# Altium PCB ECE453_PWR.PcbDoc
Units mil, origin at the board's own origin, x right, y up, seen from the top; angles counter-clockwise.
Board outline 1771.65 x 2952.76 mil, 2 copper layers (Top Layer, Bottom Layer); 32 components, 13 nets, 93 pads, 20 vias.
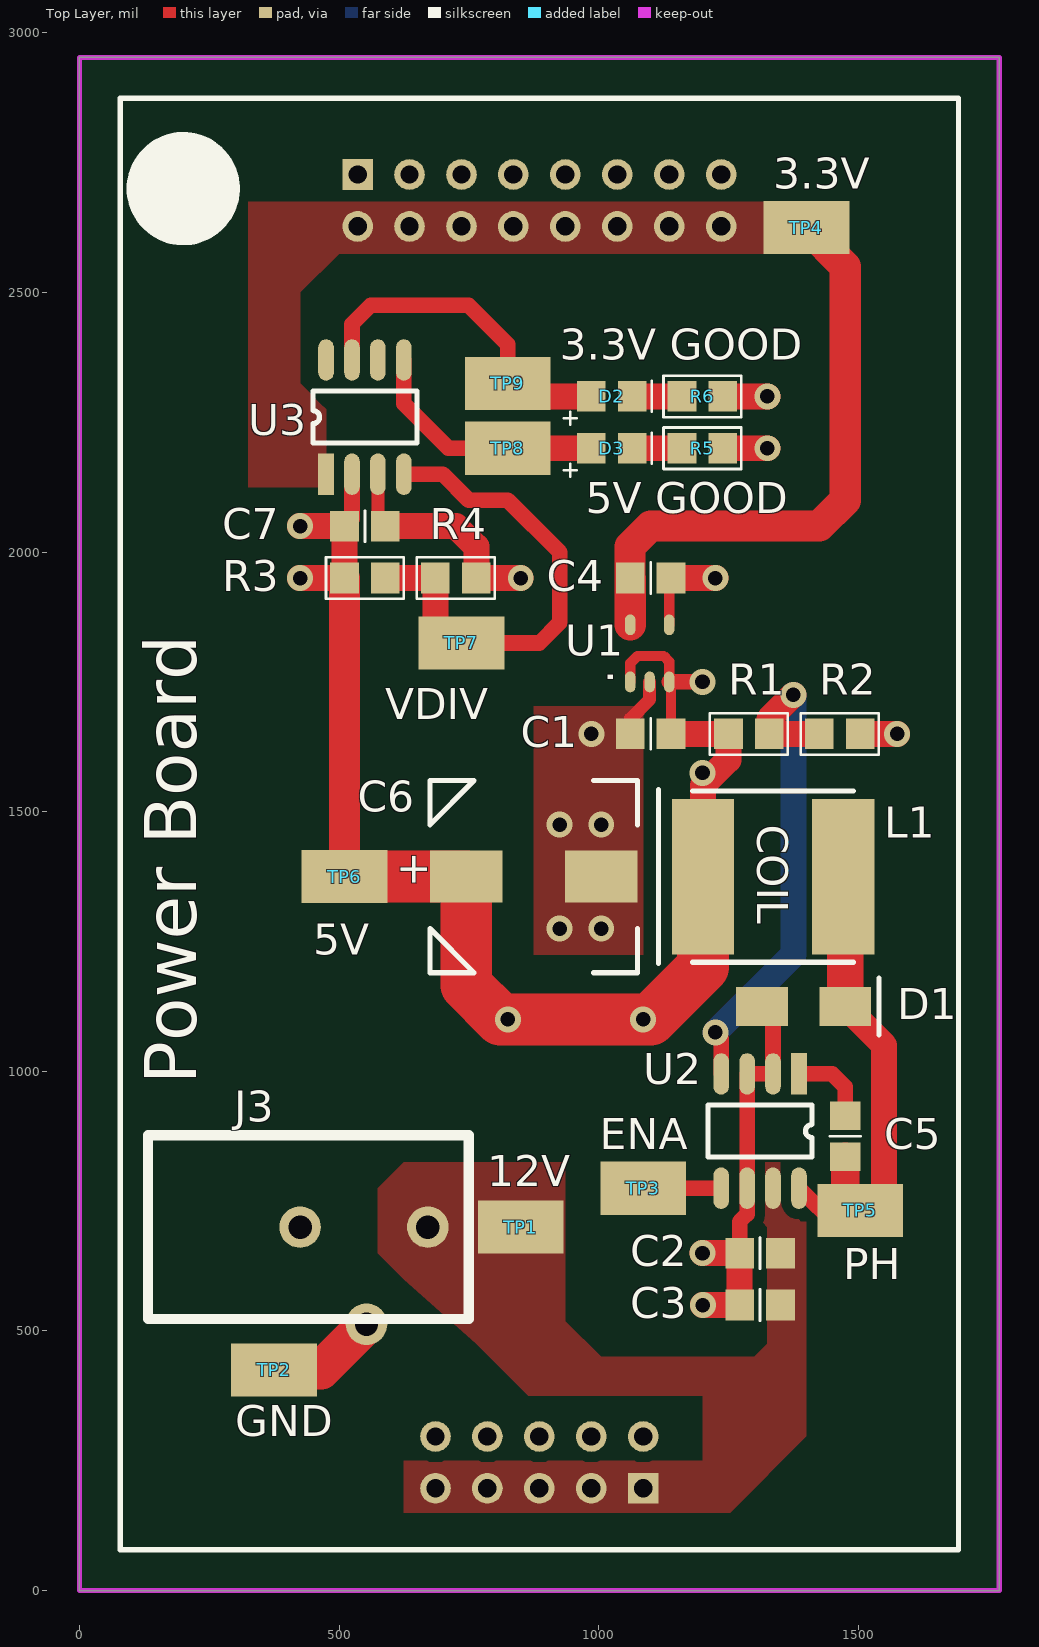
[diagram p0: Top Layer view]
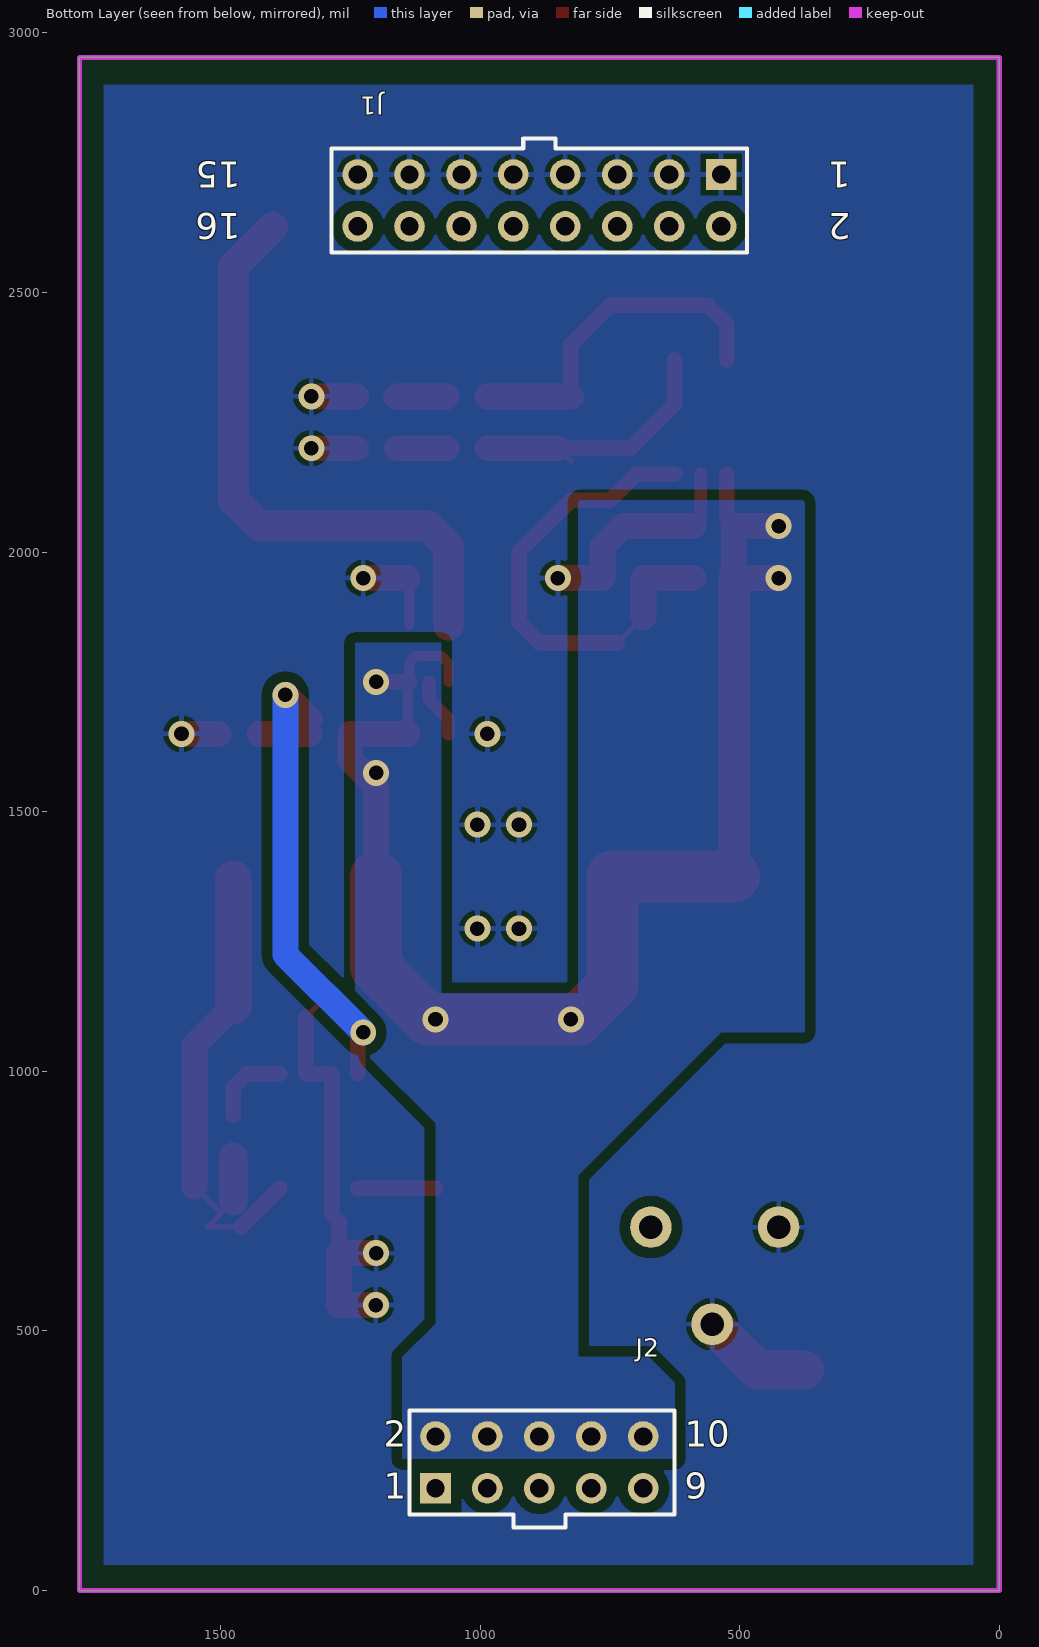
[diagram p1: Bottom Layer view, seen from below]
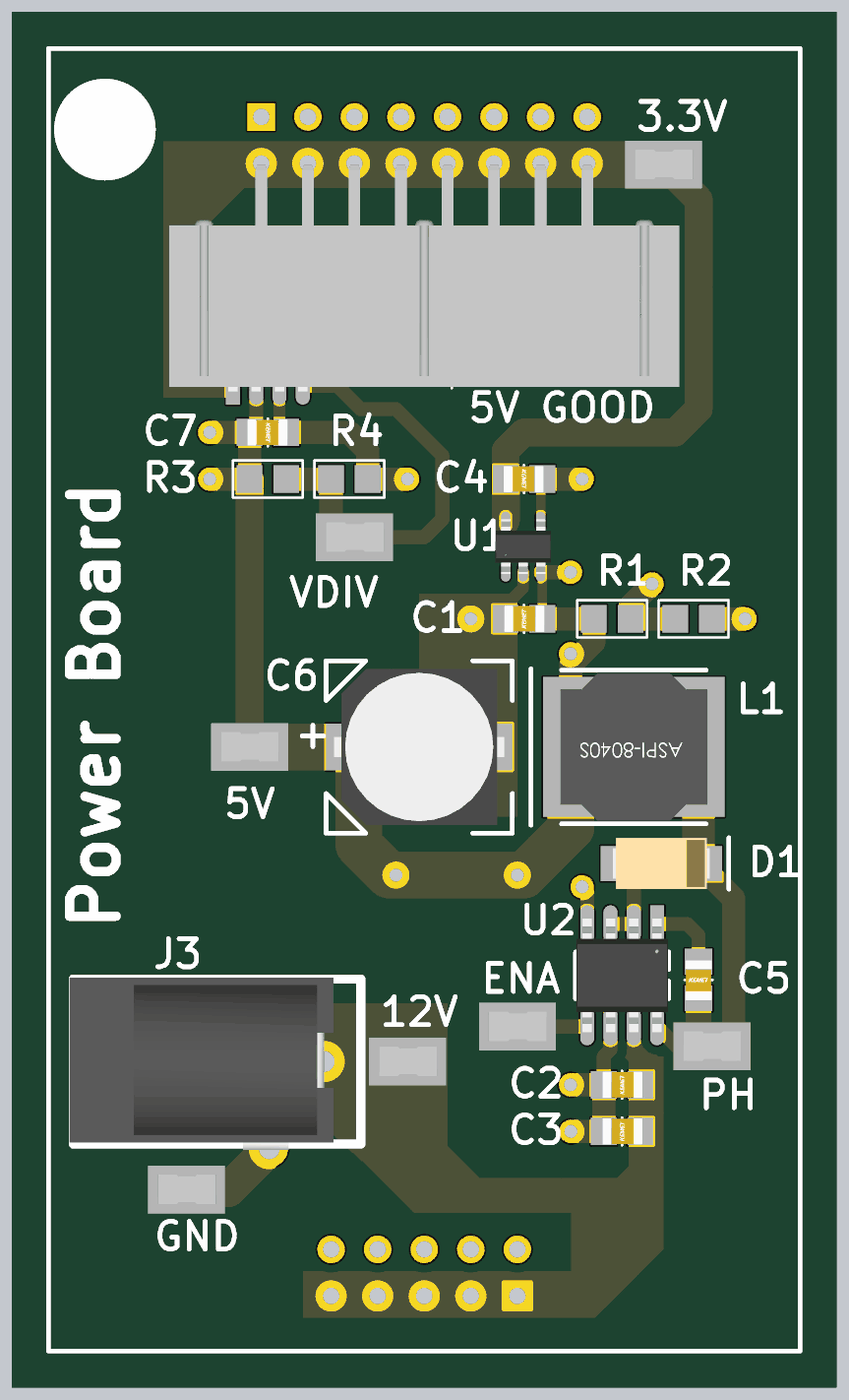
[diagram p2: 3D render of the assembled board from above, using the file's embedded part models]

## Layer stack, top to bottom
Top Solder: solder mask 0.4, Solder Resist, Dk 3.5
Top Layer: signal copper 1.4
Dielectric1: dielectric 12.6, FR-4, Dk 4.8
Bottom Layer: signal copper 1.4
Bottom Solder: solder mask 0.4, Solder Resist, Dk 3.5

## Board outline
0,0 1771.65,0 1771.65,2952.76 0,2952.76

## Design rules (kind name [scope] priority, off if disabled: settings)
Clearance Polygon_Clearance [All vs InPolygon] p1: gap=20 ignorepadtopadclearanceinfootprint=FALSE except(0: Arc-Hole Track-Hole SMDPad-Hole THPad-Hole Via-Hole Fill-Hole Poly-Hole Region-Hole Text-Hole)
Clearance [All] p2: gap=7.87 ignorepadtopadclearanceinfootprint=FALSE except(0: Arc-Hole Track-Hole SMDPad-Hole THPad-Hole Via-Hole Fill-Hole Poly-Hole Region-Hole Text-Hole)
ComponentClearance [InComponent('U3')] p1: gap=0 collisioncheckmode=3 verticalgap=10 showdistances=FALSE
Height [All] p1: minheight=0 maxheight=866.14 prefheight=500
HoleSize [All] p1: absolutevalues=TRUE maxlimit=250 minlimit=15 maxpercent=80.000 minpercent=20.000
MinimumSolderMaskSliver [All] p1: minsoldermaskwidth=7
NetAntennae NetAntennae_5.0V [InNet('5.0V')] p1: netantennaetolerance=0
NetAntennae NetAntennae_3.3V [InNet('3.3V')] p2: netantennaetolerance=0
PolygonConnect no-gaps_2 [All vs IsNamedPolygon('Top Layer-3.3V')] p1: connectstyle=Direct reliefconductorwidth=10 reliefentries=4 polygonreliefangle="90 Angle" airgapwidth=10
PolygonConnect no-gaps_1 [All vs IsNamedPolygon('Bottom Layer-5V')] p2: connectstyle=Direct reliefconductorwidth=10 reliefentries=4 polygonreliefangle="90 Angle" airgapwidth=10
PolygonConnect no-gaps [All vs IsNamedPolygon('Top Layer-GND 1')] p3: connectstyle=Direct reliefconductorwidth=10 reliefentries=4 polygonreliefangle="90 Angle" airgapwidth=10
PolygonConnect direct-connect [All vs IsNamedPolygon('12V_L01_P028')] p4: connectstyle=Direct reliefconductorwidth=15 reliefentries=4 polygonreliefangle="90 Angle" airgapwidth=10
PolygonConnect PolygonConnect_3 [All vs IsNamedPolygon('12V_L01_P028')] p5: thpad.connectstyle=Relief thpad.reliefconductorwidth=15 thpad.reliefentries=4 thpad.polygonreliefangle="90 Angle" thpad.airgapwidth=10 smdpad.connectstyle=Direct smdpad.reliefconductorwidth=10 smdpad.reliefentries=4 smdpad.polygonreliefangle="90 Angle" smdpad.airgapwidth=10 via.connectstyle=Relief via.reliefconductorwidth=10 via.reliefentries=4 via.polygonreliefangle="90 Angle" via.airgapwidth=10
PolygonConnect PolygonConnect_2 [All vs IsNamedPolygon('12V_L01_P028')] p6: thpad.connectstyle=Relief thpad.reliefconductorwidth=10 thpad.reliefentries=4 thpad.polygonreliefangle="90 Angle" thpad.airgapwidth=10 smdpad.connectstyle=Direct smdpad.reliefconductorwidth=10 smdpad.reliefentries=4 smdpad.polygonreliefangle="90 Angle" smdpad.airgapwidth=10 via.connectstyle=Relief via.reliefconductorwidth=10 via.reliefentries=4 via.polygonreliefangle="90 Angle" via.airgapwidth=10
PolygonConnect [IsNamedPolygon('5.0V_L01_P047') vs IsVia] p7: connectstyle=Relief reliefconductorwidth=10 reliefentries=4 polygonreliefangle="90 Angle" airgapwidth=10
PolygonConnect PolygonConnect_1 [All] p8: connectstyle=Relief reliefconductorwidth=10 reliefentries=4 polygonreliefangle="90 Angle" airgapwidth=10
RoutingVias [All] p1: holewidth=28 width=50 viastyle="Through Hole" minholewidth=15 minwidth=25 maxholewidth=28 maxwidth=50
SilkToSilkClearance [All] p1 off: silktosilkclearance=10
SilkToSolderMaskClearance [IsPad] p1 off: minsilkscreentomaskgap=6 clearancetoexposedcopper=TRUE
SolderMaskExpansion [All] p1: expansion=4
Width [All] p1: maxlimit=472.44 minlimit=3.94 preferedwidth=10 minimp=50.000000 maximp=50.000000 favimp=50.000000
23 further rules are at their usual default settings.

## Components (designator, comment, footprint, x,y, rotation, side; value= is the part's Value field where it differs from the comment)
C1 "1uF" CAP_0805 1100,1650 r0 top value=10UF
C2 "4.7uF" CAP_0805 1310.83,650 r0 top value=4.7UF
C3 "4.7uF" CAP_0805 1310.83,550 r0 top value=4.7UF
C4 "1uF" CAP_0805 1100,1950 r180 top value=10UF
C5 "0.01uF" CAP_0805 1475,875 r270 top value=10000PF
C6 "100 uF" CAP_100UF 875,1375 r90 top
C7 "0.1uF" CAP_0805 550,2050 r180 top value=1UF
D1 "DIODE_B340A" B340A 1320,1125 r0 top
D2 "LED_GREEN_0805.1" DIODE_0805 1025,2300 r180 top value="GRN (571nm)"
D3 "LED_GREEN_0805.1" DIODE_0805 1025,2200 r180 top value="GRN (571nm)"
J1 "CONN_HEADER_MALE_8x2" SBH11-PBPC-D08-ST-BK 885.83,2677.17 r0 bottom
J2 "CONN_HEADER_MALE_5x2" SBH11-PBPC-D05-ST-BK 885.83,246.85 r180 bottom
J3 "PWR2.5" PJ-102 671.05,700 r90 top
L1 "IND_8040S_270M" IND-ASPI-8040S 1335.83,1375 r270 top
R1 "10k" RES_0805 1289.37,1650 r180 top
R2 "RES_0805_K_003.34" RES_0805 1464.37,1650 r180 top
R3 "27K" RES_0805 550,1950 r180 top
R4 "10K" RES_0805 725,1950 r180 top
R5 "330" RES_0805 1200,2200 r0 top
R6 "330" RES_0805 1200,2300 r0 top
TP1 "TP_1206" TP-SMC-1206 850,700 r0 top
TP2 "TP_1206" TP-SMC-1206 375,425 r0 top
TP3 "TP_1206" TP-SMC-1206 1085.83,775 r0 top
TP4 "TP_1206" TP-SMC-1206 1400,2625 r0 top
TP5 "TP_1206" TP-SMC-1206 1503.74,732.35 r0 top
TP6 "TP_1206" TP-SMC-1206 510.63,1375 r0 top
TP7 "TP_1206" TP-SMC-1206 735.83,1825 r0 top
TP8 "TP_1206" TP-SMC-1206 825,2200 r0 top
TP9 "TP_1206" TP-SMC-1206 825,2325 r0 top
U1 "IC-TLV733P" TI-SOT-23-5 1058.33,1755 r90 top
U2 "IC_TPS5420" TI-SOIC-8 1385.83,995 r270 top
U3 "IC_TPS3705-33DGN.1" TI-SOIC-8 475,2150 r90 top

## Footprints (in the part's own frame and the unit in brackets; to place one, negate y for a bottom-side part, rotate by r counter-clockwise, add the part's x,y. Pads: shape width x height; smd on the part's side, far side on the other; paste and mask are expansions set on the pad)
B340A [mil]
  rect 100x75 smd: 1(-5,0) 2(155,0)
  silkscreen extent 220,-55 220,55, body extent -29,-55 179,55, height 92
CAP_100UF [mil]
  rect 100x140 smd: 1(0,130) 2(0,-130)
  silkscreen extent -185,-240 185,200, body extent -167,-183 167,183, height 407
CAP_0805 [mm]
  rect 1.4x1.5 smd: 1(-1,0) 2(1,0)
  silkscreen extent 0,-0.76 0,0.76, body extent -1.08,-0.72 1.12,0.73, height 0.88
DIODE_0805 [mm]
  rect 1.4x1.5 smd: 1(-1,0) 2(1,0)
  silkscreen extent -1.97,-0.76 2.35,1.4, body extent -1.03,-0.63 1.03,0.64, height 0.71
IND-ASPI-8040S [mil]
  rect 300x120 smd: 1(0,135) 2(0,-135)
  silkscreen extent -165,-155 165,155, body extent -157,-157 157,157
PJ-102 [mil]
  round 80 hole 45: 1(0,0) 2(0,246.05) 3(-187,118.1)
  silkscreen extent -177,-79 177,539, body extent -190,-20 180,547, height 435
RES_0805 [mm]
  rect 1.4x1.5 smd: 1(-1,0) 2(1,0)
  silkscreen extent -1.91,-1.02 1.91,1.02, body extent -1.07,-0.7 1.07,0.7, height 0.7
SBH11-PBPC-D05-ST-BK [mm]
  rect 1.5x1.5 hole 0.9: 1(-5.08,-1.27)
  round 1.5 hole 0.9: 2(-5.08,1.27) 3(-2.54,-1.27) 4(-2.54,1.27) 5(0,-1.27) 6(0,1.27) 7(2.54,-1.27) 8(2.54,1.27) 9(5.08,-1.27) 10(5.08,1.27)
  silkscreen extent -6.35,-3.17 6.6,2.54, body extent -10.1,-4.45 10.1,4.65, height 8.95
SBH11-PBPC-D08-ST-BK [mm]
  rect 1.5x1.5 hole 0.9: 1(-8.89,-1.27)
  round 1.5 hole 0.9: 2(-8.89,1.27) 3(-6.35,-1.27) 4(-6.35,1.27) 5(-3.81,-1.27) 6(-3.81,1.27) 7(-1.27,-1.27) 8(-1.27,1.27) 9(1.27,-1.27) 10(1.27,1.27) 11(3.81,-1.27) 12(3.81,1.27) 13(6.35,-1.27) 14(6.35,1.27) 15(8.89,-1.27) 16(8.89,1.27)
  silkscreen extent -10.16,-3.03 10.17,2.54, body extent -13.9,-4.34 13.92,4.76, height 9.26
TI-SOIC-8 [mil]
  rect 80x30 smd: 1(0,0)
  oval 80x30 smd: 2(0,-50) 3(0,-100) 4(0,-150) 5(220,-150) 6(220,-100) 7(220,-50) 8(220,0)
  silkscreen extent 60,-175 160,25, body extent -12,-173 232,24, height 69
TI-SOT-23-5 [mil]
  oval 40x20 smd: 1(-5,-2.5) 2(-5,-40) 3(-5,-77.5) 4(105,-77.5) 5(105,-2.5)
  body extent -9,-100 109,20, height 57
TP-SMC-1206 [mm]
  rect 4.2x2.6 smd mask+0: 1(0,0)
  body extent -1.57,-0.79 1.63,0.81, height 1.22

## Part data
C1 C4: library part CAP_0805_U_001.00, "CAP CER 1 UF 6.3V 10% X5R 0805", Package=0805, Rating=6.3V, Supplier Part Number 1=399-9160-1-ND, Tolerance=+/-10%, Supplier 1=Digi-Key
C2 C3: library part CAP_0805_U_004.70, "CAP CER 4.7 UF 16V 10% X5R 0805", Package=0805, Rating=16V, Supplier Part Number 1=478-5166-6-ND, Tolerance=+/-10%, Supplier 1=Digi-Key
C5: library part CAP_0805_U_000.01, "CAP CER 10000PF 16V 10% X7R 0805", Package=0805, Rating=16V, Supplier Part Number 1=399-7995-1-ND, Tolerance=+/-10%, Supplier 1=Digi-Key
C6: library part CAP_100uF, Capacitance=100µF, ESR (Equivalent Series Resistance)=-, Lifetime @ Temp.="5000 Hrs @ 105°C", Manufacturer=Nichicon, Manufacturer Part Number=UCD1V101MNL1GS, Operating Temperature="-55°C ~ 105°C", Package / Case="Radial, Can - SMD", Ripple Current=600mA, Supplier Part Number 1=493-6186-1-ND, Tolerance=±20%, Voltage Rating=35V, Applications="General Purpose", Category=Capacitors, ComponentLink1Description=http://nichicon-us.com/english/products/pdfs/e-cd.pdf, ComponentLink1URL=http://nichicon-us.com/english/products/pdfs/e-cd.pdf, Height - Seated (Max)="0.413\" (10.50mm)", Impedance="160 mOhm", Lead Spacing=-, Mounting Type="Surface Mount", Packaging="Cut Tape (CT)", Pricing 1="1=0.57, 10=0.548, 25=0.3884, 50=0.3272, 100=0.2659, 250=0.22088 (USD)", RoHS="RoHS Compliant", Size / Dimension="0.315\" Dia (8.00mm)", Stock 1=2915, Supplier 1=Digi-Key, Surface Mount Land Size="0.327\" L x 0.327\" W (8.30mm x 8.30mm)", Type=-
C7: library part CAP_0805_U_000.10, "CAP CER 0.1 UF 6.3V 10% X7R 0805", Package=0805, Rating=6.3V, Supplier Part Number 1=399-9155-6-ND, Tolerance=+/-10%, Supplier 1=Digi-Key
D1: "DIODE SCHOTTKY 40V 3A SMA", Average Rectified Current=3A, Capacitance=250pF, Case/Package=SMA, Forward Voltage=500mV, Manufacturer=Diodes, Manufacturer Part Number=B340A-13-F, Max Forward Surge Current (Ifsm)=80A, Max Operating Temperature=125°C, Max Repetitive Reverse Voltage (Vrrm)=40V, Min Operating Temperature=-55°C, Package Quantity=5000, Peak Reverse Current=500uA, Supplier Part Number 1=B340A-FDICT-ND, ComponentLink1Description=http://www.mccsemi.com/up_pdf/MBRX120-MBRX160(SOD123).pdf, ComponentLink1URL=http://www.mccsemi.com/up_pdf/MBRX120-MBRX160(SOD123).pdf, ComponentLink2Description=https://datasheet.ciiva.com/4245/861ds30891-4245763.pdf, ComponentLink2URL=https://datasheet.ciiva.com/4245/861ds30891-4245763.pdf, ComponentLink3Description=https://datasheet.ciiva.com/1177/ds30891-1177476.pdf, ComponentLink3URL=https://datasheet.ciiva.com/1177/ds30891-1177476.pdf, ComponentLink4Description=https://datasheet.ciiva.com/1240/ds30891-1240228.pdf, ComponentLink4URL=https://datasheet.ciiva.com/1240/ds30891-1240228.pdf, ComponentLink5Description=https://datasheet.ciiva.com/913/ds30891-913637.pdf, ComponentLink5URL=https://datasheet.ciiva.com/913/ds30891-913637.pdf, ComponentLink6Description=https://datasheet.ciiva.com/913/ds30891-913638.pdf, ComponentLink6URL=https://datasheet.ciiva.com/913/ds30891-913638.pdf, ComponentLink7Description=https://datasheet.ciiva.com/913/ds30891-913639.pdf, ComponentLink7URL=https://datasheet.ciiva.com/913/ds30891-913639.pdf, ComponentLink8Description=https://datasheet.ciiva.com/26949/getdatasheetpartid-143394-26949352.pdf, ComponentLink8URL=https://datasheet.ciiva.com/26949/getdatasheetpartid-143394-26949352.pdf, ComponentLink9Description=https://datasheet.ciiva.com/46393/1911813-46393773.pdf, ComponentLink9URL=https://datasheet.ciiva.com/46393/1911813-46393773.pdf, Contact Plating=Tin,Matte, Current=3A, Current Rating=3A, Element Configuration=Single, Forward Current=3A, Height=2.3mm, Lead Free="Lead Free", Length=4.6mm, Max Reverse Voltage (DC)=40V, Mount="Surface Mount", Number of Pins=2, Output Current=3A, Packaging="Tape and Reel", Peak Non-Repetitive Surge Current=80A, Polarity=Standard, Pricing 1="1=0.46, 10=0.373, 100=0.2538, 500=0.19034, 1000=0.14276 (USD)", Radiation Hardening=No, REACH SVHC="No SVHC", Stock 1=590182, Supplier 1=Digi-Key, Termination=SMD/SMT, Voltage=40V, Voltage Rating (DC)=40V, Weight=0.002258oz, Width=2.92mm
D2 D3: "LED GREEN CLEAR THIN 0805 SMD", Package=0805, Rating=20mA, Supplier Part Number 1=160-1426-1-ND, Tolerance=N/A, Supplier 1=Digi-Key
J1: "CONN HEADER 2.54MM 16POS GOLD", Color=Black, Manufacturer="Sullins Connector Solutions", Manufacturer Part Number=SBH11-PBPC-D08-ST-BK, Supplier Part Number 1=S9171-ND, Category="Connectors, Interconnects", ComponentLink1Description=http://sullinscorp.com/catalogs/145_PAGE118_.100_SBH11_SERIES_MALE_BOX_HDR_ST_RA_SMT.pdf, ComponentLink1URL=http://sullinscorp.com/catalogs/145_PAGE118_.100_SBH11_SERIES_MALE_BOX_HDR_ST_RA_SMT.pdf, Connector Type="Header, Shrouded", Contact Finish=Gold, Contact Finish Thickness=Flash, Contact Mating Length=-, Contact Type="Male Pin", Fastening Type=-, Features="Polarizing Key", Mounting Type="Through Hole", Number of Positions=16, Number of Positions Loaded=All, Number of Rows=2, Packaging=Tray, Part Status=Active, Pitch="0.100\" (2.54mm)", Pricing 1="1=0.55, 10=0.428, 25=0.3988, 50=0.3626, 100=0.3263, 250=0.27552, 500=0.261, 1000=0.232, 2500=0.19285 (USD)", RoHS="RoHS Compliant", Row Spacing="0.100\" (2.54mm)", Stock 1=13784, Supplier 1=Digi-Key, Termination=Solder
J2: "CONN HEADER 2.54MM 10POS GOLD", Color=Black, Manufacturer="Sullins Connector Solutions", Manufacturer Part Number=SBH11-PBPC-D05-ST-BK, Supplier Part Number 1=S9169-ND, Category="Connectors, Interconnects", ComponentLink1Description=http://sullinscorp.com/catalogs/145_PAGE118_.100_SBH11_SERIES_MALE_BOX_HDR_ST_RA_SMT.pdf, ComponentLink1URL=http://sullinscorp.com/catalogs/145_PAGE118_.100_SBH11_SERIES_MALE_BOX_HDR_ST_RA_SMT.pdf, Connector Type="Header, Shrouded", Contact Finish=Gold, Contact Finish Thickness=Flash, Contact Mating Length=-, Contact Type="Male Pin", Fastening Type=-, Features="Polarizing Key", Mounting Type="Through Hole", Number of Positions=10, Number of Positions Loaded=All, Number of Rows=2, Packaging=Tray, Part Status=Active, Pitch="0.100\" (2.54mm)", Pricing 1="1=0.64, 10=0.445, 25=0.3812, 50=0.343, 100=0.2985, 250=0.254, 500=0.2413, 1000=0.2159, 2500=0.17145 (USD)", RoHS="RoHS Compliant", Row Spacing="0.100\" (2.54mm)", Stock 1=29227, Supplier 1=Digi-Key, Termination=Solder
J3: "Low Voltage Power Supply Connector", Colour=Black, Current Rating=2.5A, Flammability Rating="UL94 V-0", Insulation Resistance=50MR, Manufacturer=CUI, Manufacturer Part Number=PJ-102A, Max Operating Temperature=85°C, Min Operating Temperature=-25°C, Package Quantity=280, Supplier Part Number 1=CP-102A-ND, Voltage Rating=24V, ComponentLink1Description="Manufacturer Link", ComponentLink1URL=http://domino.kycon.com/internet/Products.html, ComponentLink2Description=http://www.cui.com/Product/Resource/FuturePDF/PJ-102A.pdf, ComponentLink2URL=http://www.cui.com/Product/Resource/FuturePDF/PJ-102A.pdf, ComponentLink3Description=http://www.mouser.com/ds/2/670/PJ-102A-524195.pdf, ComponentLink3URL=http://www.mouser.com/ds/2/670/PJ-102A-524195.pdf, ComponentLink4Description=https://www.cui.com/product/resource/digikeypdf/pj-102a.pdf, ComponentLink4URL=https://www.cui.com/product/resource/digikeypdf/pj-102a.pdf, Connector Type=Jack, Contact Gender=Male, Contact Material=Copper, Contact Plating=Nickel, DatasheetDocument=09-May-2002, Diameter=2.1mm, Gender=Male, Housing Colour=Black, Housing Material=Thermoplastic, Lead Free="Lead Free", Mount="Through Hole", Number of Conductors=2, Orientation=Horizontal, Packaging=Bulk, Pricing 1="1=0.64, 10=0.6, 25=0.54, 50=0.48, 100=0.46, 250=0.42, 500=0.4, 1000=0.33, 2500=0.3 (USD)", Published=17-Dec-2003, Publisher="Altium Limited", Shielding=Unshielded, Stock 1=20997, Supplier 1=Digi-Key, Termination="Through Hole"
L1: Case/Package=Nonstandard, Current Rating=2A, DC Resistance (DCR)=78mR, Inductance=27uh, Manufacturer=Abracon, Manufacturer Part Number=ASPI-8040S-270M-T, Max Operating Temperature=125°C, Min Operating Temperature=-40°C, Package Quantity=1000, Saturation Current=2.15A, Self Resonant Frequency=9.2MHz, Supplier Part Number 1=ASPI-8040S-270M-TCT-ND, Test Frequency=100kHz, Tolerance=20%, ComponentLink1Description=http://www.abracon.com/Magnetics/chips/AIML-1206.pdf, ComponentLink1URL=http://www.abracon.com/Magnetics/chips/AIML-1206.pdf, ComponentLink2Description=https://datasheet.ciiva.com/8518/aspi-8040s-8518746.pdf, ComponentLink2URL=https://datasheet.ciiva.com/8518/aspi-8040s-8518746.pdf, ComponentLink3Description=https://datasheet.ciiva.com/1080/aspi-8040s-1080475.pdf, ComponentLink3URL=https://datasheet.ciiva.com/1080/aspi-8040s-1080475.pdf, ComponentLink4Description=https://datasheet.ciiva.com/1080/aspi-8040s-1080476.pdf, ComponentLink4URL=https://datasheet.ciiva.com/1080/aspi-8040s-1080476.pdf, Composition=Wirewound, Core Material=Ferrite, Height=4mm, Height - Seated (Max)=0.157inch, Lead Free="Lead Free", Length=0.315inch, Max DC Current=2A, Mount="Surface Mount", Packaging="Tape and Reel", Pricing 1="1=0.97, 10=0.897, 100=0.6486, 500=0.4968 (USD)", Shielding=Shielded, Stock 1=2115, Supplier 1=Digi-Key, Width=0.315inch
R1: library part RES_0805_K_010.00, "RES SMD 10K OHM 1% 1/8W 0805", Manufacturer="Panasonic Electronic Components", Manufacturer Part Number=ERJ-6ENF1002V, Operating Temperature="-55°C ~ 155°C", Package / Case="0805 (2012 Metric)", Power (Watts)="0.125W, 1/8W", Supplier Device Package=0805, Supplier Part Number=P10.0KCCT-ND, Temperature Coefficient=±100ppm/°C, Tolerance=±1%, Category=Resistors, Composition="Thick Film", Failure Rate=-, Features="Automotive AEC-Q200", Height - Seated (Max)="0.028\" (0.70mm)", Number of Terminations=2, Packaging="Cut Tape (CT)", Part Status=Active, Resistance (Ohms)=10k, RoHS="RoHS Compliant", Size / Dimension="0.079\" L x 0.049\" W (2.00mm x 1.25mm)", Supplier=Digi-Key
R2: "RES SMD 3.24K OHM 1% 1/8W 0805", Case/Package=0805, Case Code (Metric)=2012, Manufacturer=Panasonic, Manufacturer Part Number=ERJ-6ENF3241V, Max Operating Temperature=155°C, Max Power Dissipation=125mW, Min Operating Temperature=-55°C, Package Quantity=1, Resistance=3.24k, Supplier Part Number 1=P3.24KCCT-ND, Temperature Coefficient=100ppm/°C, Tolerance=1%, Voltage Rating=150V, Case Code (Imperial)=0805, ComponentLink1Description=https://datasheet.ciiva.com/9196/aoa0000ce2-9196535.pdf, ComponentLink1URL=https://datasheet.ciiva.com/9196/aoa0000ce2-9196535.pdf, ComponentLink2Description=https://datasheet.ciiva.com/30112/aoa0000ce2-30112759.pdf, ComponentLink2URL=https://datasheet.ciiva.com/30112/aoa0000ce2-30112759.pdf, ComponentLink3Description=https://datasheet.ciiva.com/28531/1694929-28531704.pdf, ComponentLink3URL=https://datasheet.ciiva.com/28531/1694929-28531704.pdf, ComponentLink4Description=https://datasheet.ciiva.com/46372/1678782-46372873.pdf, ComponentLink4URL=https://datasheet.ciiva.com/46372/1678782-46372873.pdf, ComponentLink5Description=https://datasheet.ciiva.com/17213/aoa0000ce2-17213770.pdf, ComponentLink5URL=https://datasheet.ciiva.com/17213/aoa0000ce2-17213770.pdf, ComponentLink6Description=https://datasheet.ciiva.com/46372/1678782-46372874.pdf, ComponentLink6URL=https://datasheet.ciiva.com/46372/1678782-46372874.pdf, ComponentLink7Description=https://datasheet.ciiva.com/24026/aoa0000ce2-24026155.pdf, ComponentLink7URL=https://datasheet.ciiva.com/24026/aoa0000ce2-24026155.pdf, ComponentLink8Description=https://datasheet.ciiva.com/22668/1678782-22668189.pdf, ComponentLink8URL=https://datasheet.ciiva.com/22668/1678782-22668189.pdf, Composition="Thick Film", Contact Plating=Tin, Depth=1.25mm, Height=0.6mm, Lead Free="Lead Free", Length=2mm, Military Standard=Not, Mount="Surface Mount", Number of Terminations=2, Packaging="Tape and Reel", Power Rating=125mW, Pricing 1="1=0.1, 10=0.079, 100=0.0305, 1000=0.0134, 2500=0.01157 (USD)", Radiation Hardening=No, REACH SVHC="No SVHC", Stock 1=232903, Supplier 1=Digi-Key, Termination=SMD/SMT, Voltage Rating (DC)=150V, Width=0.049inch
R3: library part RES_0805_K_027.00, "RES SMD 27.0K OHM 1% 1/8W 0805", Manufacturer="Panasonic Electronic Components", Manufacturer Part Number=ERJ-6ENF2802V, Operating Temperature="-55°C ~ 155°C", Package / Case="0805 (2012 Metric)", Power (Watts)="0.125W, 1/8W", Resistance (Ohms)=28k, Supplier Device Package=0805, Supplier Part Number=P28.0KCCT-ND, Supplier Part Number 1=CR0805-FX-2702GLFDKR-ND, Temperature Coefficient=±100ppm/°C, Tolerance=±1%, Category=Resistors, Composition="Thick Film", Failure Rate=-, Features="Automotive AEC-Q200", Height - Seated (Max)="0.028\" (0.70mm)", Number of Terminations=2, Packaging="Cut Tape (CT)", Part Status=Active, RoHS="RoHS Compliant", Size / Dimension="0.079\" L x 0.049\" W (2.00mm x 1.25mm)", Supplier=Digi-Key, Supplier 1=Digi-Key
R4: library part RES_0805_K_010.00, "RES SMD 10K OHM 1% 1/8W 0805", Manufacturer="Panasonic Electronic Components", Manufacturer Part Number=ERJ-6ENF1002V, Operating Temperature="-55°C ~ 155°C", Package / Case="0805 (2012 Metric)", Power (Watts)="0.125W, 1/8W", Resistance (Ohms)=10k, Supplier Device Package=0805, Supplier Part Number=P10.0KCCT-ND, Temperature Coefficient=±100ppm/°C, Tolerance=±1%, Category=Resistors, Composition="Thick Film", Failure Rate=-, Features="Automotive AEC-Q200", Height - Seated (Max)="0.028\" (0.70mm)", Number of Terminations=2, Packaging="Cut Tape (CT)", Part Status=Active, RoHS="RoHS Compliant", Size / Dimension="0.079\" L x 0.049\" W (2.00mm x 1.25mm)", Supplier=Digi-Key
R5 R6: library part RES_0805_R_330.00, "RES SMD 330 OHM 1% 1/8W 0805", Manufacturer="Panasonic Electronic Components", Manufacturer Part Number=ERJ-6GEYJ331V, Operating Temperature="-55°C ~ 155°C", Package / Case="0805 (2012 Metric)", Power (Watts)="0.125W, 1/8W", Supplier Device Package=0805, Supplier Part Number=P330ACT-ND, Temperature Coefficient=±200ppm/°C, Tolerance=±5%, Category=Resistors, Composition="Thick Film", Failure Rate=-, Features="Automotive AEC-Q200", Height - Seated (Max)="0.028\" (0.70mm)", Number of Terminations=2, Packaging="Cut Tape (CT)", Part Status=Active, Resistance (Ohms)=330, RoHS="RoHS Compliant", Size / Dimension="0.079\" L x 0.049\" W (2.00mm x 1.25mm)", Supplier=Digi-Key
TP1 TP2 TP3 TP4 TP5 TP6 TP7 TP8 TP9: "Test Point SMD 1206", Supplier Part Number 1=A106143CT-ND, Supplier 1=Digi-Key
U1: "IC REG LINEAR 3.3V 300MA SOT23-5"
U2: "IC REG BUCK ADJ 2A 8SOIC", Case/Package=D, Manufacturer="Texas Instruments", Manufacturer Part Number=TPS5420DR, Max Input Voltage=36V, Max Operating Temperature=125°C, Max Output Current=2A, Max Output Voltage=31V, Min Input Voltage=5.5V, Min Operating Temperature=-40°C, Min Output Voltage=1.23V, Package Quantity=2500, Quiescent Current=3mA, Supplier Part Number 1=296-31984-1-ND, Switching Frequency=500kHz, ComponentLink1Description=https://datasheet.ciiva.com/6596/tps5420-6596997.pdf, ComponentLink1URL=https://datasheet.ciiva.com/6596/tps5420-6596997.pdf, ComponentLink2Description=https://datasheet.ciiva.com/6596/tps5420-6596998.pdf, ComponentLink2URL=https://datasheet.ciiva.com/6596/tps5420-6596998.pdf, ComponentLink3Description=https://datasheet.ciiva.com/34302/1523971-34302343.pdf, ComponentLink3URL=https://datasheet.ciiva.com/34302/1523971-34302343.pdf, ComponentLink4Description=https://datasheet.ciiva.com/3220/tps5420-3220184.pdf, ComponentLink4URL=https://datasheet.ciiva.com/3220/tps5420-3220184.pdf, ComponentLink5Description=https://datasheet.ciiva.com/6580/tps5420-6580024.pdf, ComponentLink5URL=https://datasheet.ciiva.com/6580/tps5420-6580024.pdf, ComponentLink6Description=https://datasheet.ciiva.com/3220/tps5420-3220185.pdf, ComponentLink6URL=https://datasheet.ciiva.com/3220/tps5420-3220185.pdf, Efficiency=95%, Lead Free="Lead Free", Number of Outputs=1, Number of Pins=8, Operating Supply Voltage=36V, Output Current=2A, Output Voltage=31V, Packaging="Tape and Reel", Pricing 1="1=3.24, 10=2.912, 100=2.3861, 500=2.03124, 1000=1.7131 (USD)", Radiation Hardening=No, Stock 1=17036, Supplier 1=Digi-Key, Synchronous Rectifier=No, Weight=0.002677oz
U3: "IC 2.93V PROCESSOR MONITOR 8MSOP", Manufacturer="Texas Instruments", Manufacturer Part Number=TPS3705-33D, Number of Voltages Monitored=1, Operating Temperature="-40°C ~ 85°C (TA)", Package / Case="8-SOIC (0.154\", 3.90mm Width)", Supplier Device Package=8-SOIC, Supplier Part Number 1=296-2623-5-ND, Voltage - Threshold=2.93V, Category="Integrated Circuits (ICs)", ComponentLink1Description=http://www.ti.com/lit/ds/symlink/tps3705-30.pdf, ComponentLink1URL=http://www.ti.com/lit/ds/symlink/tps3705-30.pdf, Mounting Type="Surface Mount", Output="Push-Pull, Totem Pole", Packaging=Tube, Part Status=Active, Pricing 1="1=2.04, 10=1.831, 100=1.4718, 500=1.20926, 1000=1.00195, 2500=0.93285, 5000=0.8983, 10000=0.86375 (USD)", Reset="Active Low", Reset Timeout="140 ms Minimum", RoHS="RoHS Compliant", Stock 1=1844, Supplier 1=Digi-Key, Type="Simple Reset/Power-On Reset"

## Via types
v1: diameter 50, hole 28, Top Layer to Bottom Layer, 20 vias

## Nets (pads, with @x,y where several pads share a name; then routed paths per layer and width w, separated by ;. In a path a pad name is that pad's centre, name@x,y a point inside that pad or via, vN(x,y) a via of type N, cw(c..) or ccw(c..) an arc to the next point about the centre after c; other vN are vias at no path point)
3.3V: C4.2 J1.2 J1.4 J1.6 J1.8 J1.10 J1.12 J1.14 J1.16 TP4.1 U1.5 U3.1 | length 1161.2
  Top Layer w10: C4.2 C4.2@1060.83,1949.8 ; J1.16 J1.16@1237.99,2625
  Top Layer w60: C4.2 1060.63,2010.63 1100,2050 1425,2050 1475,2100 1475,2550 TP4.1 ; U1.5 C4.2@1060.83,1949.8
5V: C1.2 C6.1 C7.2 J2.2 J2.4 J2.6 J2.8 J2.10 L1.2 R1.2 R3.2 TP6.1 U1.1 U1.3 U3.2 | length 2826.8
  Top Layer w10: C7.2 C7.2@525,2064.37 ; U1.3 U1.3@1139.37,1746.46
  Top Layer w20: U1.1 1060.83,1785.83 1075,1800 1125,1800 1135.83,1789.17 U1.3 ; C1.2 U1.3@1139.37,1746.46
  Top Layer w30: C7.2@525,2064.37 U3.2 ; U1.3 v1(1200,1750)
  Top Layer w50: v1(425,1950) R3.2 C7.2 v1(425,2050) ; C1.2 R1.2 1250,1600 1200.83,1550.83 L1.2
  Top Layer w60: TP6.1 R3.2
  Top Layer w100: TP6.1 C6.1 745,1165.83 810.83,1100 1100,1100 1200.83,1200.83 L1.2
  other v1: 825,1100 1085.83,1100 1200,1575
12V: C2.2 C3.2 J2.1 J2.3 J2.5 J2.7 J2.9 J3.1 TP1.1 U2.7
GND: C1.1 C2.1 C3.1 C4.1 C6.2 C7.1 D1.1 J1.1 J1.3 J1.5 J1.7 J1.9 J1.11 J1.13 J1.15 J3.2 J3.3 R2.1 R4.1 R5.2 R6.2 TP2.1 U1.2 U1.4 U2.2 U2.3 U2.6 U3.3 | length 1980.1
  Top Layer w10: C7.1@575,2064.37 C7.1 ; C1.1 C1.1@1064.37,1653.74 ; C4.1@1135.83,1946.46 C4.1 ; D1.1 D1.1@1335.83,1104.17
  Top Layer w20: U1.4 C4.1@1135.83,1946.46
  Top Layer w25: C7.1@575,2064.37 U3.3 ; C1.1 1060.63,1678.35 1098.33,1716.04 U1.2
  Top Layer w30: C2.1 1271.46,710.63 1285.83,725 U2.6 U2.3 U2.2 D1.1@1335.83,1104.17
  Top Layer w50: C7.1 725,2050 764.37,2010.63 R4.1 v1(850,1950) ; C4.1 v1(1225,1950) ; v1(1200,650) C2.1 C3.1 v1(1200.83,550) ; R5.2 v1(1325,2200) ; R6.2 v1(1325,2300) ; R2.1 v1(1575,1650)
  Top Layer w75: TP2.1 464.95,425 J3.3
  other v1: 925,1275 1005,1275 925,1475 1005,1475 985.83,1650
NetC5_1: C5.1 U2.1 | length 155.2
  Top Layer w30: U2.1 1450,995 1475,970 C5.1
NetC5_2: C5.2 D1.2 L1.1 TP5.1 U2.8 | length 1021.2
  Top Layer w10: TP5.1@1460.83,700 1525,700 TP5.1@1475,750 ; L1.1 L1.1@1475,1370.83 ; TP5.1 TP5.1@1550,778.61
  Top Layer w30: U2.8 TP5.1@1460.83,700
  Top Layer w50: D1.2 1550,1050 TP5.1@1550,778.61
  Top Layer w55: TP5.1@1475,750 C5.2
  Top Layer w70: D1.2 L1.1@1475,1370.83
NetD2_1: D2.1 R6.1 | length 96.3
  Top Layer w50: D2.1 R6.1
NetD2_2: D2.2 TP9.1 U3.7 | length 650.7
  Top Layer w30: U3.7 525,2439.17 560.83,2475 750,2475 825,2400 TP9.1
  Top Layer w50: TP9.1@825,2300 D2.2
NetD3_1: D3.1 R5.1 | length 96.3
  Top Layer w50: D3.1 R5.1
NetD3_2: D3.2 TP8.1 U3.5 | length 490.7
  Top Layer w10: TP8.1@825,2175 TP8.1@850,2200
  Top Layer w30: U3.5 625,2285.83 710.83,2200 TP8.1
  Top Layer w50: TP8.1@850,2200 D3.2
NetR1_1: R1.1 R2.2 U2.4 | length 987
  Top Layer w10: R1.1 R1.1@1328.74,1678.74
  Top Layer w30: v1(1225,1075) 1235.83,1064.17 U2.4
  Top Layer w50: R1.1 R2.2 ; R1.1@1328.74,1678.74 v1(1375,1725)
  Bottom Layer w50: v1(1225,1075) 1375,1225 v1(1375,1725)
NetR3_1: R3.1 R4.2 TP7.1 U3.4 | length 945.4
  Top Layer w10: TP7.1@685.63,1875.2 TP7.1
  Top Layer w30: U3.4 700,2150 750,2100 825,2100 925,2000 925,1864.17 885.83,1825 TP7.1
  Top Layer w50: R3.1 R4.2 TP7.1@685.63,1875.2
NetTP3_1: TP3.1 U2.5 | length 150
  Top Layer w30: TP3.1 U2.5
pads on no net: U3.6 U3.8

## Polygon pours and split planes (outlines as drawn)
3.3V on Top Layer "Top Layer-3.3V" (solid, pour order 36): 475,2125 475,2275 464.17,2285.83 425,2325 425,2500 500,2575 1470.83,2575 1470.83,2675 325,2675 325,2125
GND on Top Layer "Top Layer-GND 1" (solid, pour order 32): 875,1225 875,1703.54 1085.83,1703.54 1085.83,1225
12V on Top Layer "12V_L01_P028" (solid, pour order 30): 1400,710.63 1389.57,710.63 1350.2,750 1350.2,825 1315,825 1315,710 1325,700 1325,475 1300,450 1005,450 935.83,519.17 935.83,825 625,825 575,775 575,650 625,600 764.37,475 864.37,375 1200.83,375 1200.83,250 625,250 625,150 1253.15,150 1400,296.85
GND on Top Layer "Top Layer-GND" (solid, pour order 26): 1771.65,2952.76
3.3V on Top Layer "Top Layer-3.3V_MEZZ 1" (solid, pour order 24): 460.83,2687.64
no net on Bottom Layer "Bottom Layer-No Net" (solid, pour order 28): -475,1425
5V on Bottom Layer "Bottom Layer-5V" (solid, pour order 16): 625,253.59 1150,253.59 1150,450 1085.83,514.17 1085.83,900 1240.83,1055 1240.83,1825 1075,1825 1075,1150 810.8,1150 810.88,2100 374.83,2100 375.17,1075 535.8,1075 810.8,800 810.8,450 675,450 625,400
GND on Bottom Layer "Bottom Layer-GND" (solid, pour order 34): 50,2900 50,50 1725,50 1725,2900

## Keep-outs
Keep-Out Layer:
  the board outline again, w10

## Silkscreen, mask and mechanical layers (free items; w line width, h text height)
Top Overlay:
  circle w118.11: c200,2700 r50
  lines w10: 78.74,78.74 78.74,2874.02 1692.91,2874.02 1692.91,78.74 78.74,78.74
  text "3.3V" at 1335.83,2700 h60
  text "3.3V GOOD" at 925,2370 h60
  text "5V GOOD" at 975,2075 h60
  text "VDIV" at 589.37,1678.35 h60
  text "5V" at 450,1225 h60
  text "Power Board" at 225,975 h100 r90
  text "ENA" at 1002.14,850 h60
  text "12V" at 785.83,778.61 h60
  text "PH" at 1470.83,600 h60
  text "GND" at 300,296.85 h60
Mechanical 1:
  text "45mm x 75mm (1772mil x 2953mil)" at 25,-100 h60
Mechanical 9:
  the board outline again, w10

## Text inside footprints (layer, text, board x,y; h text height)
C6: Top Overlay "+" at 670,1355 h60 r90
J1: Bottom Overlay "2" at 285.83,2652.17 h50 r180; Bottom Overlay "1" at 285.83,2752.17 h50 r180; Bottom Overlay "15" at 1460.83,2752.17 h50 r180; Bottom Overlay "16" at 1460.83,2652.17 h50 r180
J2: Bottom Overlay "2" at 1185.83,276.85 h50; Bottom Overlay "1" at 1185.83,176.85 h50; Bottom Overlay "9" at 605.83,176.85 h50; Bottom Overlay "10" at 605.83,276.85 h50
L1: Top Overlay "COIL" at 1305.83,1475 h60 r270